# EAGLE board LSM9DS0_Breakout_Board-panel3 (EAGLE 7.1.0), part 1 of 3
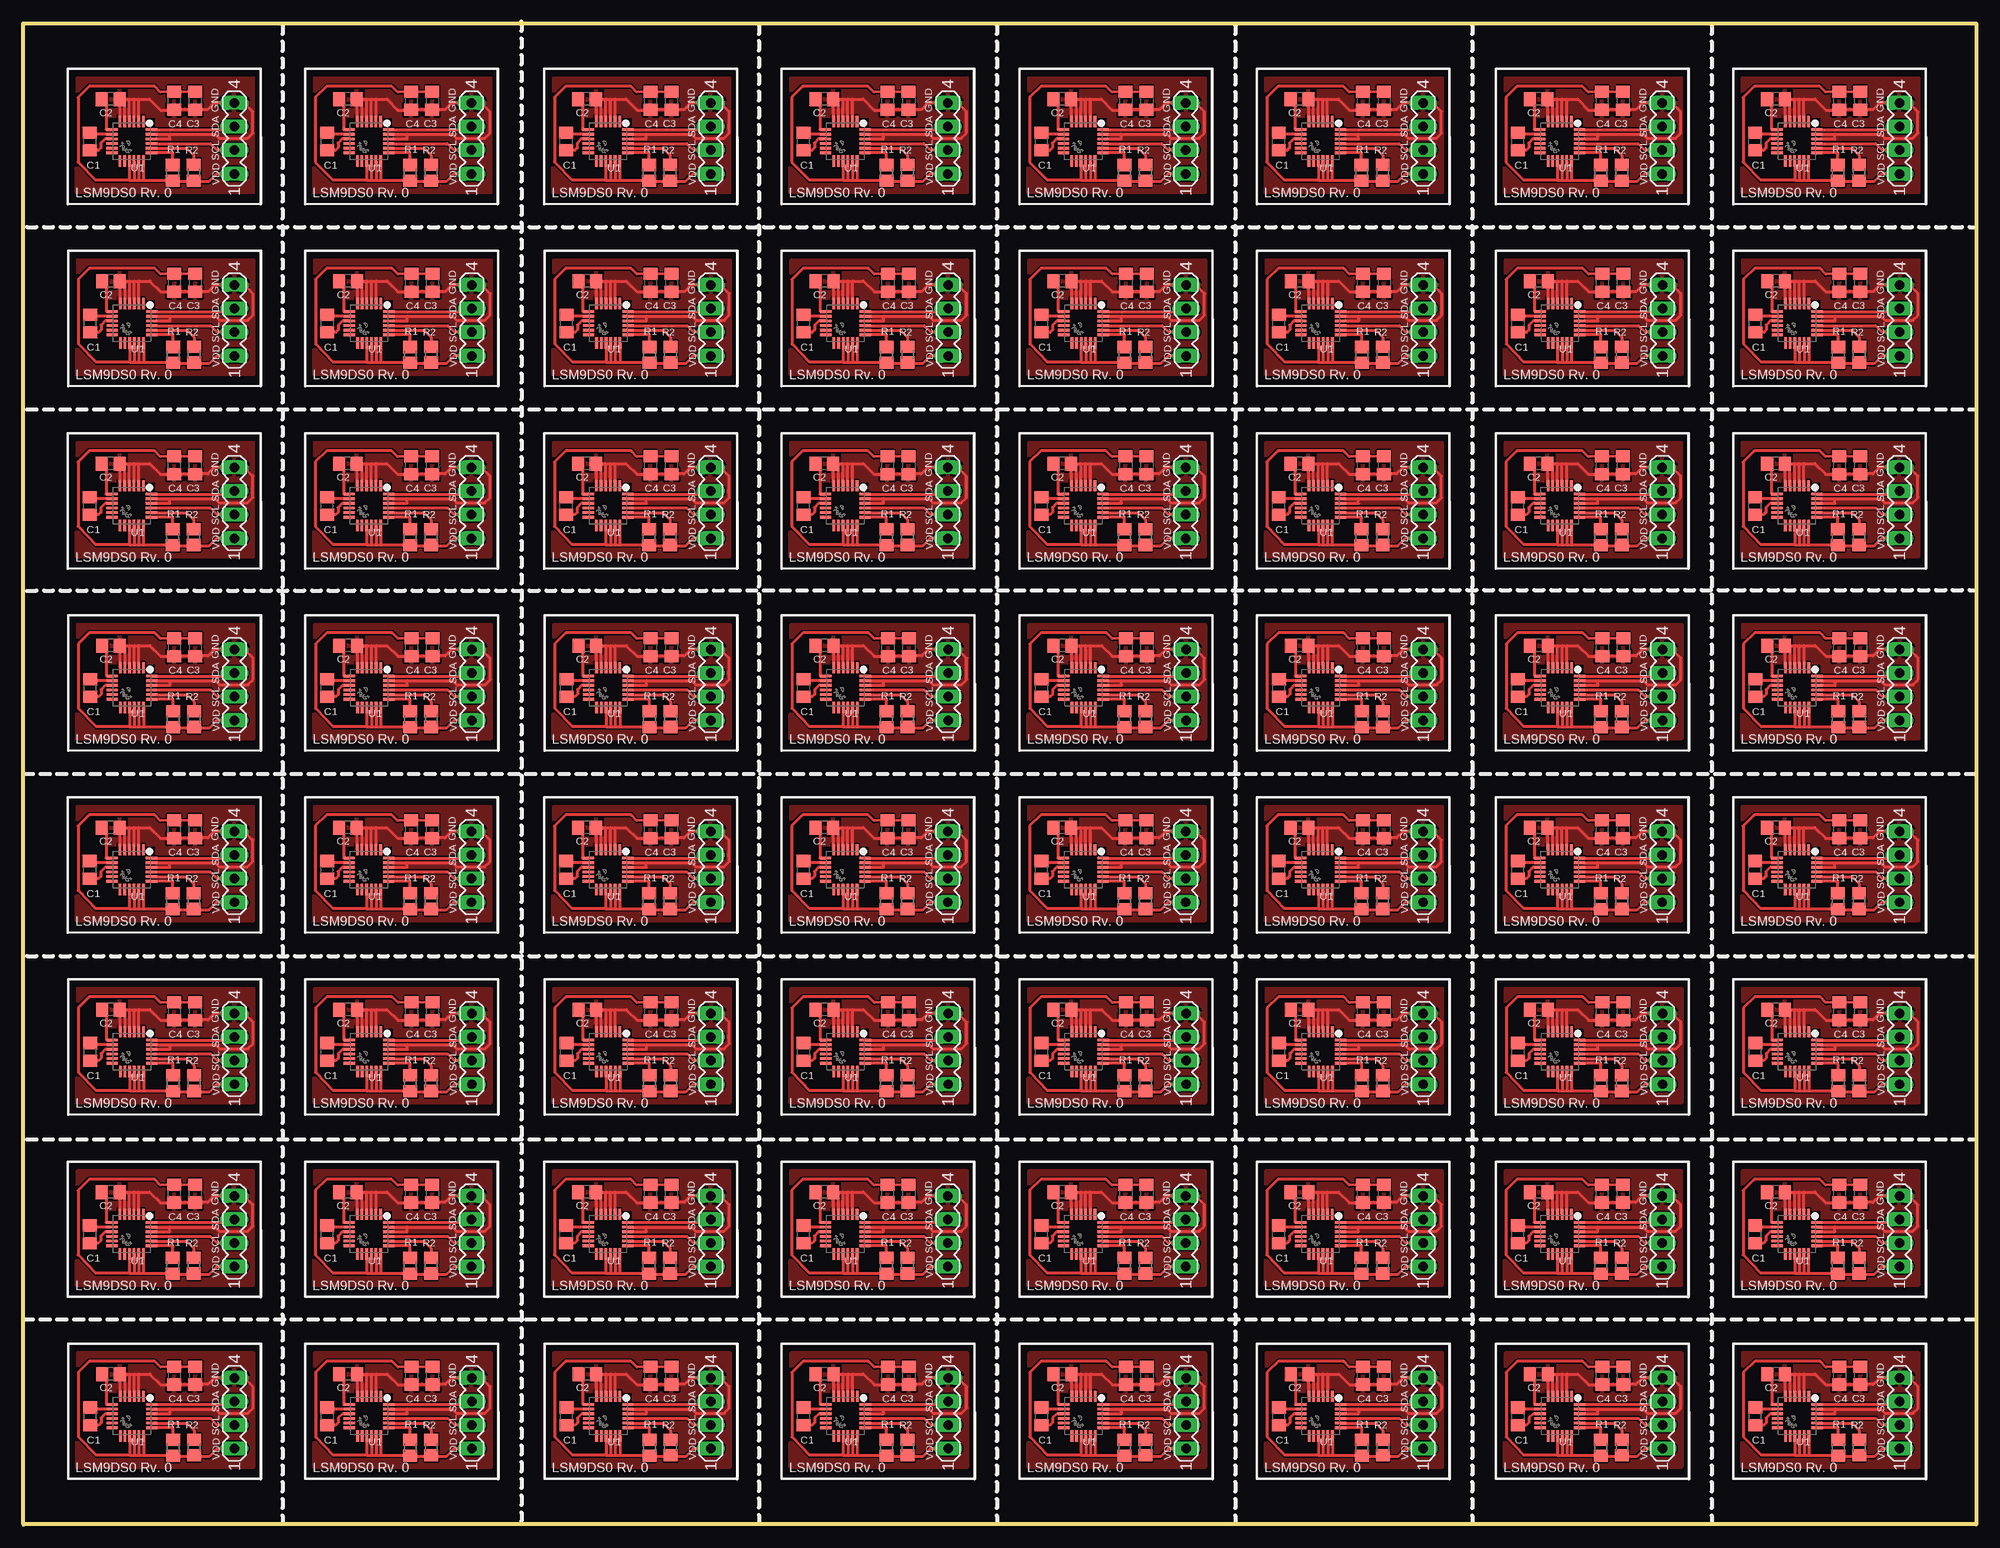
[diagram p0: board, top side]

Size 209.93 x 161.32 mm. Coordinates in mm from the lower left corner, seen from the top.
Outline: 0,161.32 209.91,161.32 209.93,0 0,0 0,161.32
Copper layers (1*16): Top 0.035559375mm / dielectric 1.501140625mm / Bottom 0.035559375mm
Design rules "4pcb-33board *": minimum track width 8mil, minimum drill 15mil, track to track 6mil, track to pad 6mil, pad to pad 6mil, via to via 6mil, smd to smd 6mil, copper to edge 10mil, drill to drill 10mil, minimum pad ring 10mil, minimum via ring 8mil, stop-mask expansion 4mil, vias tented up to drill 0mil, thermal gap 10mil
Net classes: 1 RFSIG: width 0.457 mm, clearance 0.205 mm to class 0, clearance 0.205 mm
bRestrict: area 10.2,10.1 to 13.2,13.1; area 10.2,29.6 to 13.1,32.7; area 10.2,49.2 to 13.2,52.3; area 10.2,68.8 to 13.1,71.9; area 10.2,88.3 to 13.2,91.4; area 10.2,107.9 to 13.1,111; area 10.2,127.5 to 13.2,130.6; area 10.2,147.1 to 13.1,150.1; area 35.7,10.1 to 38.7,13.1; area 35.7,29.6 to 38.6,32.7; area 35.7,49.2 to 38.7,52.3; area 35.7,68.8 to 38.6,71.9; 52 more areas

## Footprints (pad centres in the part's own frame; a part is rotated, then mirrored left to right if it is on the bottom)
C0805 = smd 1.3 x 1.5: 1 -0.95,0; 2 0.95,0
R0805 = smd 1.3 x 1.5: 1 -0.85,0; 2 0.85,0
MA04-1 = drill 1.016 long: 1 -3.81,0; 2 -1.27,0; 3 1.27,0; 4 3.81,0
LGA-24 = smd 1.208 x 0.29: 1 -2.129,1.25; 2 -2.129,0.75; 3 -2.129,0.25; 4 -2.129,-0.25; 5 -2.129,-0.75; 6 -2.129,-1.25; 13 2.129,-1.25; 14 2.129,-0.75; 15 2.129,-0.25; 16 2.129,0.25; 17 2.129,0.75; 18 2.129,1.25 | smd 0.29 x 1.208: 7 -1.25,-2.129; 8 -0.75,-2.129; 9 -0.25,-2.129; 10 0.25,-2.129; 11 0.75,-2.129; 12 1.25,-2.129; 19 1.25,2.129; 20 0.75,2.129; 21 0.25,2.129; 22 -0.25,2.129; 23 -0.75,2.129; 24 -1.25,2.129

## Placement (x,y rotation side)
C1  0.22uF  [C0805]  7.19,11.61 90 top
C2  4.7uF  [C0805]  9.42,16.15 180 top
C3  10uF  [C0805]  18.49,15.98 270 top
C4  100nF  [C0805]  16.23,15.98 270 top
C5  100nF  [C0805]  16.21,35.53 270 top
C6  10uF  [C0805]  18.47,35.53 270 top
C7  0.22uF  [C0805]  7.16,31.17 90 top
C8  4.7uF  [C0805]  9.4,35.71 180 top
C9  100nF  [C0805]  16.23,55.14 270 top
C10  10uF  [C0805]  18.49,55.14 270 top
C11  0.22uF  [C0805]  7.19,50.77 90 top
C12  4.7uF  [C0805]  9.42,55.32 180 top
C13  100nF  [C0805]  16.21,74.7 270 top
C14  10uF  [C0805]  18.47,74.7 270 top
C15  0.22uF  [C0805]  7.16,70.33 90 top
C16  4.7uF  [C0805]  9.4,74.88 180 top
C17  100nF  [C0805]  16.23,94.26 270 top
C18  10uF  [C0805]  18.49,94.26 270 top
C19  0.22uF  [C0805]  7.19,89.89 90 top
C20  4.7uF  [C0805]  9.42,94.44 180 top
C21  100nF  [C0805]  16.21,113.82 270 top
C22  10uF  [C0805]  18.47,113.82 270 top
C23  0.22uF  [C0805]  7.16,109.45 90 top
C24  4.7uF  [C0805]  9.4,114 180 top
C25  100nF  [C0805]  16.23,133.43 270 top
C26  10uF  [C0805]  18.49,133.43 270 top
C27  0.22uF  [C0805]  7.19,129.06 90 top
C28  4.7uF  [C0805]  9.42,133.6 180 top
C29  100nF  [C0805]  16.21,152.98 270 top
C30  10uF  [C0805]  18.47,152.98 270 top
C31  0.22uF  [C0805]  7.16,148.62 90 top
C32  4.7uF  [C0805]  9.4,153.16 180 top
C33  100nF  [C0805]  41.73,15.98 270 top
C34  10uF  [C0805]  43.99,15.98 270 top
C35  0.22uF  [C0805]  32.69,11.61 90 top
C36  4.7uF  [C0805]  34.92,16.15 180 top
C37  100nF  [C0805]  41.71,35.53 270 top
C38  10uF  [C0805]  43.97,35.53 270 top
C39  0.22uF  [C0805]  32.66,31.17 90 top
C40  4.7uF  [C0805]  34.9,35.71 180 top
C41  100nF  [C0805]  41.73,55.14 270 top
C42  10uF  [C0805]  43.99,55.14 270 top
C43  0.22uF  [C0805]  32.69,50.77 90 top
C44  4.7uF  [C0805]  34.92,55.32 180 top
C45  100nF  [C0805]  41.71,74.7 270 top
C46  10uF  [C0805]  43.97,74.7 270 top
C47  0.22uF  [C0805]  32.66,70.33 90 top
C48  4.7uF  [C0805]  34.9,74.88 180 top
C49  100nF  [C0805]  41.73,94.26 270 top
C50  10uF  [C0805]  43.99,94.26 270 top
C51  0.22uF  [C0805]  32.69,89.89 90 top
C52  4.7uF  [C0805]  34.92,94.44 180 top
C53  100nF  [C0805]  41.71,113.82 270 top
C54  10uF  [C0805]  43.97,113.82 270 top
C55  0.22uF  [C0805]  32.66,109.45 90 top
C56  4.7uF  [C0805]  34.9,114 180 top
C57  100nF  [C0805]  41.73,133.43 270 top
C58  10uF  [C0805]  43.99,133.43 270 top
C59  0.22uF  [C0805]  32.69,129.06 90 top
C60  4.7uF  [C0805]  34.92,133.6 180 top
C61  100nF  [C0805]  41.71,152.98 270 top
C62  10uF  [C0805]  43.97,152.98 270 top
C63  0.22uF  [C0805]  32.66,148.62 90 top
C64  4.7uF  [C0805]  34.9,153.16 180 top
C65  100nF  [C0805]  67.44,15.98 270 top
C66  10uF  [C0805]  69.7,15.98 270 top
C67  0.22uF  [C0805]  58.39,11.61 90 top
C68  4.7uF  [C0805]  60.63,16.15 180 top
C69  100nF  [C0805]  67.41,35.53 270 top
C70  10uF  [C0805]  69.67,35.53 270 top
C71  0.22uF  [C0805]  58.37,31.17 90 top
C72  4.7uF  [C0805]  60.6,35.71 180 top
C73  100nF  [C0805]  67.44,55.14 270 top
C74  10uF  [C0805]  69.7,55.14 270 top
C75  0.22uF  [C0805]  58.39,50.77 90 top
C76  4.7uF  [C0805]  60.63,55.32 180 top
C77  100nF  [C0805]  67.41,74.7 270 top
C78  10uF  [C0805]  69.67,74.7 270 top
C79  0.22uF  [C0805]  58.37,70.33 90 top
C80  4.7uF  [C0805]  60.6,74.88 180 top
C81  100nF  [C0805]  67.44,94.26 270 top
C82  10uF  [C0805]  69.7,94.26 270 top
C83  0.22uF  [C0805]  58.39,89.89 90 top
C84  4.7uF  [C0805]  60.63,94.44 180 top
C85  100nF  [C0805]  67.41,113.82 270 top
C86  10uF  [C0805]  69.67,113.82 270 top
C87  0.22uF  [C0805]  58.37,109.45 90 top
C88  4.7uF  [C0805]  60.6,114 180 top
C89  100nF  [C0805]  67.44,133.43 270 top
C90  10uF  [C0805]  69.7,133.43 270 top
C91  0.22uF  [C0805]  58.39,129.06 90 top
C92  4.7uF  [C0805]  60.63,133.6 180 top
C93  100nF  [C0805]  67.41,152.98 270 top
C94  10uF  [C0805]  69.67,152.98 270 top
C95  0.22uF  [C0805]  58.37,148.62 90 top
C96  4.7uF  [C0805]  60.6,153.16 180 top
C97  100nF  [C0805]  92.94,15.98 270 top
C98  10uF  [C0805]  95.2,15.98 270 top
C99  0.22uF  [C0805]  83.9,11.61 90 top
C100  4.7uF  [C0805]  86.13,16.15 180 top
C101  100nF  [C0805]  92.91,35.53 270 top
C102  10uF  [C0805]  95.17,35.53 270 top
C103  0.22uF  [C0805]  83.87,31.17 90 top
C104  4.7uF  [C0805]  86.11,35.71 180 top
C105  100nF  [C0805]  92.94,55.14 270 top
C106  10uF  [C0805]  95.2,55.14 270 top
C107  0.22uF  [C0805]  83.9,50.77 90 top
C108  4.7uF  [C0805]  86.13,55.32 180 top
C109  100nF  [C0805]  92.91,74.7 270 top
C110  10uF  [C0805]  95.17,74.7 270 top
C111  0.22uF  [C0805]  83.87,70.33 90 top
C112  4.7uF  [C0805]  86.11,74.88 180 top
C113  100nF  [C0805]  92.94,94.26 270 top
C114  10uF  [C0805]  95.2,94.26 270 top
C115  0.22uF  [C0805]  83.9,89.89 90 top
C116  4.7uF  [C0805]  86.13,94.44 180 top
C117  100nF  [C0805]  92.91,113.82 270 top
C118  10uF  [C0805]  95.17,113.82 270 top
C119  0.22uF  [C0805]  83.87,109.45 90 top
C120  4.7uF  [C0805]  86.11,114 180 top
C121  100nF  [C0805]  92.94,133.43 270 top
C122  10uF  [C0805]  95.2,133.43 270 top
C123  0.22uF  [C0805]  83.9,129.06 90 top
C124  4.7uF  [C0805]  86.13,133.6 180 top
C125  100nF  [C0805]  92.91,152.98 270 top
C126  10uF  [C0805]  95.17,152.98 270 top
C127  0.22uF  [C0805]  83.87,148.62 90 top
C128  4.7uF  [C0805]  86.11,153.16 180 top
C129  100nF  [C0805]  118.52,15.98 270 top
C130  10uF  [C0805]  120.78,15.98 270 top
C131  0.22uF  [C0805]  109.47,11.61 90 top
C132  4.7uF  [C0805]  111.71,16.15 180 top
C133  100nF  [C0805]  118.49,35.53 270 top
C134  10uF  [C0805]  120.75,35.53 270 top
C135  0.22uF  [C0805]  109.45,31.17 90 top
C136  4.7uF  [C0805]  111.68,35.71 180 top
C137  100nF  [C0805]  118.52,55.14 270 top
C138  10uF  [C0805]  120.78,55.14 270 top
C139  0.22uF  [C0805]  109.47,50.77 90 top
C140  4.7uF  [C0805]  111.71,55.32 180 top
C141  100nF  [C0805]  118.49,74.7 270 top
C142  10uF  [C0805]  120.75,74.7 270 top
C143  0.22uF  [C0805]  109.45,70.33 90 top
C144  4.7uF  [C0805]  111.68,74.88 180 top
C145  100nF  [C0805]  118.52,94.26 270 top
C146  10uF  [C0805]  120.78,94.26 270 top
C147  0.22uF  [C0805]  109.47,89.89 90 top
C148  4.7uF  [C0805]  111.71,94.44 180 top
C149  100nF  [C0805]  118.49,113.82 270 top
C150  10uF  [C0805]  120.75,113.82 270 top
C151  0.22uF  [C0805]  109.45,109.45 90 top
C152  4.7uF  [C0805]  111.68,114 180 top
C153  100nF  [C0805]  118.52,133.43 270 top
C154  10uF  [C0805]  120.78,133.43 270 top
C155  0.22uF  [C0805]  109.47,129.06 90 top
C156  4.7uF  [C0805]  111.71,133.6 180 top
C157  100nF  [C0805]  118.49,152.98 270 top
C158  10uF  [C0805]  120.75,152.98 270 top
C159  0.22uF  [C0805]  109.45,148.62 90 top
C160  4.7uF  [C0805]  111.68,153.16 180 top
C161  100nF  [C0805]  144.02,15.98 270 top
C162  10uF  [C0805]  146.28,15.98 270 top
C163  0.22uF  [C0805]  134.98,11.61 90 top
C164  4.7uF  [C0805]  137.21,16.15 180 top
C165  100nF  [C0805]  143.99,35.53 270 top
C166  10uF  [C0805]  146.25,35.53 270 top
C167  0.22uF  [C0805]  134.95,31.17 90 top
C168  4.7uF  [C0805]  137.19,35.71 180 top
C169  100nF  [C0805]  144.02,55.14 270 top
C170  10uF  [C0805]  146.28,55.14 270 top
C171  0.22uF  [C0805]  134.98,50.77 90 top
C172  4.7uF  [C0805]  137.21,55.32 180 top
C173  100nF  [C0805]  143.99,74.7 270 top
C174  10uF  [C0805]  146.25,74.7 270 top
C175  0.22uF  [C0805]  134.95,70.33 90 top
C176  4.7uF  [C0805]  137.19,74.88 180 top
C177  100nF  [C0805]  144.02,94.26 270 top
C178  10uF  [C0805]  146.28,94.26 270 top
C179  0.22uF  [C0805]  134.98,89.89 90 top
C180  4.7uF  [C0805]  137.21,94.44 180 top
C181  100nF  [C0805]  143.99,113.82 270 top
C182  10uF  [C0805]  146.25,113.82 270 top
C183  0.22uF  [C0805]  134.95,109.45 90 top
C184  4.7uF  [C0805]  137.19,114 180 top
C185  100nF  [C0805]  144.02,133.43 270 top
C186  10uF  [C0805]  146.28,133.43 270 top
C187  0.22uF  [C0805]  134.98,129.06 90 top
C188  4.7uF  [C0805]  137.21,133.6 180 top
C189  100nF  [C0805]  143.99,152.98 270 top
C190  10uF  [C0805]  146.25,152.98 270 top
C191  0.22uF  [C0805]  134.95,148.62 90 top
C192  4.7uF  [C0805]  137.19,153.16 180 top
C193  100nF  [C0805]  169.72,15.98 270 top
C194  10uF  [C0805]  171.98,15.98 270 top
C195  0.22uF  [C0805]  160.68,11.61 90 top
C196  4.7uF  [C0805]  162.92,16.15 180 top
C197  100nF  [C0805]  169.7,35.53 270 top
C198  10uF  [C0805]  171.96,35.53 270 top
C199  0.22uF  [C0805]  160.66,31.17 90 top
C200  4.7uF  [C0805]  162.89,35.71 180 top
C201  100nF  [C0805]  169.72,55.14 270 top
C202  10uF  [C0805]  171.98,55.14 270 top
C203  0.22uF  [C0805]  160.68,50.77 90 top
C204  4.7uF  [C0805]  162.92,55.32 180 top
C205  100nF  [C0805]  169.7,74.7 270 top
C206  10uF  [C0805]  171.96,74.7 270 top
C207  0.22uF  [C0805]  160.66,70.33 90 top
C208  4.7uF  [C0805]  162.89,74.88 180 top
C209  100nF  [C0805]  169.72,94.26 270 top
C210  10uF  [C0805]  171.98,94.26 270 top
C211  0.22uF  [C0805]  160.68,89.89 90 top
C212  4.7uF  [C0805]  162.92,94.44 180 top
C213  100nF  [C0805]  169.7,113.82 270 top
C214  10uF  [C0805]  171.96,113.82 270 top
C215  0.22uF  [C0805]  160.66,109.45 90 top
C216  4.7uF  [C0805]  162.89,114 180 top
C217  100nF  [C0805]  169.72,133.43 270 top
C218  10uF  [C0805]  171.98,133.43 270 top
C219  0.22uF  [C0805]  160.68,129.06 90 top
C220  4.7uF  [C0805]  162.92,133.6 180 top
C221  100nF  [C0805]  169.7,152.98 270 top
C222  10uF  [C0805]  171.96,152.98 270 top
C223  0.22uF  [C0805]  160.66,148.62 90 top
C224  4.7uF  [C0805]  162.89,153.16 180 top
C225  100nF  [C0805]  195.22,15.98 270 top
C226  10uF  [C0805]  197.49,15.98 270 top
C227  0.22uF  [C0805]  186.18,11.61 90 top
C228  4.7uF  [C0805]  188.42,16.15 180 top
C229  100nF  [C0805]  195.2,35.53 270 top
C230  10uF  [C0805]  197.46,35.53 270 top
C231  0.22uF  [C0805]  186.16,31.17 90 top
C232  4.7uF  [C0805]  188.39,35.71 180 top
C233  100nF  [C0805]  195.22,55.14 270 top
C234  10uF  [C0805]  197.49,55.14 270 top
C235  0.22uF  [C0805]  186.18,50.77 90 top
C236  4.7uF  [C0805]  188.42,55.32 180 top
C237  100nF  [C0805]  195.2,74.7 270 top
C238  10uF  [C0805]  197.46,74.7 270 top
C239  0.22uF  [C0805]  186.16,70.33 90 top
C240  4.7uF  [C0805]  188.39,74.88 180 top
C241  100nF  [C0805]  195.22,94.26 270 top
C242  10uF  [C0805]  197.49,94.26 270 top
C243  0.22uF  [C0805]  186.18,89.89 90 top
C244  4.7uF  [C0805]  188.42,94.44 180 top
C245  100nF  [C0805]  195.2,113.82 270 top
C246  10uF  [C0805]  197.46,113.82 270 top
C247  0.22uF  [C0805]  186.16,109.45 90 top
C248  4.7uF  [C0805]  188.39,114 180 top
C249  100nF  [C0805]  195.22,133.43 270 top
C250  10uF  [C0805]  197.49,133.43 270 top
C251  0.22uF  [C0805]  186.18,129.06 90 top
C252  4.7uF  [C0805]  188.42,133.6 180 top
C253  100nF  [C0805]  195.2,152.98 270 top
C254  10uF  [C0805]  197.46,152.98 270 top
C255  0.22uF  [C0805]  186.16,148.62 90 top
C256  4.7uF  [C0805]  188.39,153.16 180 top
R1  10k  [R0805]  16.1,8.23 270 top
R2  10k  [R0805]  18.36,8.25 270 top
R3  10k  [R0805]  16.08,27.79 270 top
R4  10k  [R0805]  18.34,27.81 270 top
R5  10k  [R0805]  16.1,47.4 270 top
R6  10k  [R0805]  18.36,47.42 270 top
R7  10k  [R0805]  16.08,66.95 270 top
R8  10k  [R0805]  18.34,66.98 270 top
R9  10k  [R0805]  16.1,86.51 270 top
R10  10k  [R0805]  18.36,86.54 270 top
R11  10k  [R0805]  16.08,106.07 270 top
R12  10k  [R0805]  18.34,106.1 270 top
R13  10k  [R0805]  16.1,125.68 270 top
R14  10k  [R0805]  18.36,125.7 270 top
R15  10k  [R0805]  16.08,145.24 270 top
R16  10k  [R0805]  18.34,145.26 270 top
R17  10k  [R0805]  41.61,8.23 270 top
R18  10k  [R0805]  43.87,8.25 270 top
R19  10k  [R0805]  41.58,27.79 270 top
R20  10k  [R0805]  43.84,27.81 270 top
R21  10k  [R0805]  41.61,47.4 270 top
R22  10k  [R0805]  43.87,47.42 270 top
R23  10k  [R0805]  41.58,66.95 270 top
R24  10k  [R0805]  43.84,66.98 270 top
R25  10k  [R0805]  41.61,86.51 270 top
R26  10k  [R0805]  43.87,86.54 270 top
R27  10k  [R0805]  41.58,106.07 270 top
R28  10k  [R0805]  43.84,106.1 270 top
R29  10k  [R0805]  41.61,125.68 270 top
R30  10k  [R0805]  43.87,125.7 270 top
R31  10k  [R0805]  41.58,145.24 270 top
R32  10k  [R0805]  43.84,145.26 270 top
R33  10k  [R0805]  67.31,8.23 270 top
R34  10k  [R0805]  69.57,8.25 270 top
R35  10k  [R0805]  67.28,27.79 270 top
R36  10k  [R0805]  69.55,27.81 270 top
R37  10k  [R0805]  67.31,47.4 270 top
R38  10k  [R0805]  69.57,47.42 270 top
R39  10k  [R0805]  67.28,66.95 270 top
R40  10k  [R0805]  69.55,66.98 270 top
R41  10k  [R0805]  67.31,86.51 270 top
R42  10k  [R0805]  69.57,86.54 270 top
R43  10k  [R0805]  67.28,106.07 270 top
R44  10k  [R0805]  69.55,106.1 270 top
R45  10k  [R0805]  67.31,125.68 270 top
R46  10k  [R0805]  69.57,125.7 270 top
R47  10k  [R0805]  67.28,145.24 270 top
R48  10k  [R0805]  69.55,145.26 270 top
R49  10k  [R0805]  92.81,8.23 270 top
R50  10k  [R0805]  95.07,8.25 270 top
R51  10k  [R0805]  92.79,27.79 270 top
R52  10k  [R0805]  95.05,27.81 270 top
R53  10k  [R0805]  92.81,47.4 270 top
R54  10k  [R0805]  95.07,47.42 270 top
R55  10k  [R0805]  92.79,66.95 270 top
R56  10k  [R0805]  95.05,66.98 270 top
R57  10k  [R0805]  92.81,86.51 270 top
R58  10k  [R0805]  95.07,86.54 270 top
R59  10k  [R0805]  92.79,106.07 270 top
R60  10k  [R0805]  95.05,106.1 270 top
R61  10k  [R0805]  92.81,125.68 270 top
R62  10k  [R0805]  95.07,125.7 270 top
R63  10k  [R0805]  92.79,145.24 270 top
R64  10k  [R0805]  95.05,145.26 270 top
R65  10k  [R0805]  118.39,8.23 270 top
R66  10k  [R0805]  120.65,8.25 270 top
R67  10k  [R0805]  118.36,27.79 270 top
R68  10k  [R0805]  120.62,27.81 270 top
R69  10k  [R0805]  118.39,47.4 270 top
R70  10k  [R0805]  120.65,47.42 270 top
R71  10k  [R0805]  118.36,66.95 270 top
R72  10k  [R0805]  120.62,66.98 270 top
R73  10k  [R0805]  118.39,86.51 270 top
R74  10k  [R0805]  120.65,86.54 270 top
R75  10k  [R0805]  118.36,106.07 270 top
R76  10k  [R0805]  120.62,106.1 270 top
R77  10k  [R0805]  118.39,125.68 270 top
R78  10k  [R0805]  120.65,125.7 270 top
R79  10k  [R0805]  118.36,145.24 270 top
R80  10k  [R0805]  120.62,145.26 270 top
R81  10k  [R0805]  143.89,8.23 270 top
R82  10k  [R0805]  146.15,8.25 270 top
R83  10k  [R0805]  143.87,27.79 270 top
R84  10k  [R0805]  146.13,27.81 270 top
R85  10k  [R0805]  143.89,47.4 270 top
R86  10k  [R0805]  146.15,47.42 270 top
R87  10k  [R0805]  143.87,66.95 270 top
R88  10k  [R0805]  146.13,66.98 270 top
R89  10k  [R0805]  143.89,86.51 270 top
R90  10k  [R0805]  146.15,86.54 270 top
R91  10k  [R0805]  143.87,106.07 270 top
R92  10k  [R0805]  146.13,106.1 270 top
R93  10k  [R0805]  143.89,125.68 270 top
R94  10k  [R0805]  146.15,125.7 270 top
R95  10k  [R0805]  143.87,145.24 270 top
R96  10k  [R0805]  146.13,145.26 270 top
R97  10k  [R0805]  169.6,8.23 270 top
R98  10k  [R0805]  171.86,8.25 270 top
R99  10k  [R0805]  169.57,27.79 270 top
R100  10k  [R0805]  171.83,27.81 270 top
R101  10k  [R0805]  169.6,47.4 270 top
R102  10k  [R0805]  171.86,47.42 270 top
R103  10k  [R0805]  169.57,66.95 270 top
R104  10k  [R0805]  171.83,66.98 270 top
R105  10k  [R0805]  169.6,86.51 270 top
R106  10k  [R0805]  171.86,86.54 270 top
R107  10k  [R0805]  169.57,106.07 270 top
R108  10k  [R0805]  171.83,106.1 270 top
R109  10k  [R0805]  169.6,125.68 270 top
R110  10k  [R0805]  171.86,125.7 270 top
R111  10k  [R0805]  169.57,145.24 270 top
R112  10k  [R0805]  171.83,145.26 270 top
R113  10k  [R0805]  195.1,8.23 270 top
R114  10k  [R0805]  197.36,8.25 270 top
R115  10k  [R0805]  195.07,27.79 270 top
R116  10k  [R0805]  197.33,27.81 270 top
R117  10k  [R0805]  195.1,47.4 270 top
R118  10k  [R0805]  197.36,47.42 270 top
R119  10k  [R0805]  195.07,66.95 270 top
R120  10k  [R0805]  197.33,66.98 270 top
R121  10k  [R0805]  195.1,86.51 270 top
R122  10k  [R0805]  197.36,86.54 270 top
R123  10k  [R0805]  195.07,106.07 270 top
R124  10k  [R0805]  197.33,106.1 270 top
R125  10k  [R0805]  195.1,125.68 270 top
R126  10k  [R0805]  197.36,125.7 270 top
R127  10k  [R0805]  195.07,145.24 270 top
R128  10k  [R0805]  197.33,145.26 270 top
SV1  JP1  [MA04-1]  22.71,11.94 90 top
SV2  JP1  [MA04-1]  22.68,31.5 90 top
SV3  JP1  [MA04-1]  22.71,51.1 90 top
SV4  JP1  [MA04-1]  22.68,70.66 90 top
SV5  JP1  [MA04-1]  22.71,90.22 90 top
SV6  JP1  [MA04-1]  22.68,109.78 90 top
SV7  JP1  [MA04-1]  22.71,129.39 90 top
SV8  JP1  [MA04-1]  22.68,148.95 90 top
SV9  JP1  [MA04-1]  48.21,11.94 90 top
SV10  JP1  [MA04-1]  48.18,31.5 90 top
SV11  JP1  [MA04-1]  48.21,51.1 90 top
SV12  JP1  [MA04-1]  48.18,70.66 90 top
SV13  JP1  [MA04-1]  48.21,90.22 90 top
SV14  JP1  [MA04-1]  48.18,109.78 90 top
SV15  JP1  [MA04-1]  48.21,129.39 90 top
SV16  JP1  [MA04-1]  48.18,148.95 90 top
SV17  JP1  [MA04-1]  73.91,11.94 90 top
SV18  JP1  [MA04-1]  73.89,31.5 90 top
SV19  JP1  [MA04-1]  73.91,51.1 90 top
SV20  JP1  [MA04-1]  73.89,70.66 90 top
SV21  JP1  [MA04-1]  73.91,90.22 90 top
SV22  JP1  [MA04-1]  73.89,109.78 90 top
SV23  JP1  [MA04-1]  73.91,129.39 90 top
SV24  JP1  [MA04-1]  73.89,148.95 90 top
SV25  JP1  [MA04-1]  99.42,11.94 90 top
SV26  JP1  [MA04-1]  99.39,31.5 90 top
SV27  JP1  [MA04-1]  99.42,51.1 90 top
SV28  JP1  [MA04-1]  99.39,70.66 90 top
SV29  JP1  [MA04-1]  99.42,90.22 90 top
SV30  JP1  [MA04-1]  99.39,109.78 90 top
SV31  JP1  [MA04-1]  99.42,129.39 90 top
SV32  JP1  [MA04-1]  99.39,148.95 90 top
SV33  JP1  [MA04-1]  124.99,11.94 90 top
SV34  JP1  [MA04-1]  124.97,31.5 90 top
SV35  JP1  [MA04-1]  124.99,51.1 90 top
SV36  JP1  [MA04-1]  124.97,70.66 90 top
SV37  JP1  [MA04-1]  124.99,90.22 90 top
SV38  JP1  [MA04-1]  124.97,109.78 90 top
SV39  JP1  [MA04-1]  124.99,129.39 90 top
SV40  JP1  [MA04-1]  124.97,148.95 90 top
SV41  JP1  [MA04-1]  150.5,11.94 90 top
SV42  JP1  [MA04-1]  150.47,31.5 90 top
SV43  JP1  [MA04-1]  150.5,51.1 90 top
SV44  JP1  [MA04-1]  150.47,70.66 90 top
SV45  JP1  [MA04-1]  150.5,90.22 90 top
SV46  JP1  [MA04-1]  150.47,109.78 90 top
SV47  JP1  [MA04-1]  150.5,129.39 90 top
SV48  JP1  [MA04-1]  150.47,148.95 90 top
SV49  JP1  [MA04-1]  176.2,11.94 90 top
SV50  JP1  [MA04-1]  176.17,31.5 90 top
SV51  JP1  [MA04-1]  176.2,51.1 90 top
SV52  JP1  [MA04-1]  176.17,70.66 90 top
SV53  JP1  [MA04-1]  176.2,90.22 90 top
SV54  JP1  [MA04-1]  176.17,109.78 90 top
SV55  JP1  [MA04-1]  176.2,129.39 90 top
SV56  JP1  [MA04-1]  176.17,148.95 90 top
SV57  JP1  [MA04-1]  201.7,11.94 90 top
SV58  JP1  [MA04-1]  201.68,31.5 90 top
SV59  JP1  [MA04-1]  201.7,51.1 90 top
SV60  JP1  [MA04-1]  201.68,70.66 90 top
SV61  JP1  [MA04-1]  201.7,90.22 90 top
SV62  JP1  [MA04-1]  201.68,109.78 90 top
SV63  JP1  [MA04-1]  201.7,129.39 90 top
SV64  JP1  [MA04-1]  201.68,148.95 90 top
U1  LSM9DS0  [LGA-24]  11.68,11.63 270 top
U2  LSM9DS0  [LGA-24]  11.66,31.19 270 top
U3  LSM9DS0  [LGA-24]  11.68,50.8 270 top
U4  LSM9DS0  [LGA-24]  11.66,70.36 270 top
U5  LSM9DS0  [LGA-24]  11.68,89.92 270 top
U6  LSM9DS0  [LGA-24]  11.66,109.47 270 top
U7  LSM9DS0  [LGA-24]  11.68,129.08 270 top
U8  LSM9DS0  [LGA-24]  11.66,148.64 270 top
U9  LSM9DS0  [LGA-24]  37.19,11.63 270 top
U10  LSM9DS0  [LGA-24]  37.16,31.19 270 top
U11  LSM9DS0  [LGA-24]  37.19,50.8 270 top
U12  LSM9DS0  [LGA-24]  37.16,70.36 270 top
U13  LSM9DS0  [LGA-24]  37.19,89.92 270 top
U14  LSM9DS0  [LGA-24]  37.16,109.47 270 top
U15  LSM9DS0  [LGA-24]  37.19,129.08 270 top
U16  LSM9DS0  [LGA-24]  37.16,148.64 270 top
U17  LSM9DS0  [LGA-24]  62.89,11.63 270 top
U18  LSM9DS0  [LGA-24]  62.87,31.19 270 top
U19  LSM9DS0  [LGA-24]  62.89,50.8 270 top
U20  LSM9DS0  [LGA-24]  62.87,70.36 270 top
U21  LSM9DS0  [LGA-24]  62.89,89.92 270 top
U22  LSM9DS0  [LGA-24]  62.87,109.47 270 top
U23  LSM9DS0  [LGA-24]  62.89,129.08 270 top
U24  LSM9DS0  [LGA-24]  62.87,148.64 270 top
U25  LSM9DS0  [LGA-24]  88.39,11.63 270 top
U26  LSM9DS0  [LGA-24]  88.37,31.19 270 top
U27  LSM9DS0  [LGA-24]  88.39,50.8 270 top
U28  LSM9DS0  [LGA-24]  88.37,70.36 270 top
U29  LSM9DS0  [LGA-24]  88.39,89.92 270 top
U30  LSM9DS0  [LGA-24]  88.37,109.47 270 top
U31  LSM9DS0  [LGA-24]  88.39,129.08 270 top
U32  LSM9DS0  [LGA-24]  88.37,148.64 270 top
U33  LSM9DS0  [LGA-24]  113.97,11.63 270 top
U34  LSM9DS0  [LGA-24]  113.94,31.19 270 top
U35  LSM9DS0  [LGA-24]  113.97,50.8 270 top
U36  LSM9DS0  [LGA-24]  113.94,70.36 270 top
U37  LSM9DS0  [LGA-24]  113.97,89.92 270 top
U38  LSM9DS0  [LGA-24]  113.94,109.47 270 top
U39  LSM9DS0  [LGA-24]  113.97,129.08 270 top
U40  LSM9DS0  [LGA-24]  113.94,148.64 270 top
U41  LSM9DS0  [LGA-24]  139.47,11.63 270 top
U42  LSM9DS0  [LGA-24]  139.45,31.19 270 top
U43  LSM9DS0  [LGA-24]  139.47,50.8 270 top
U44  LSM9DS0  [LGA-24]  139.45,70.36 270 top
U45  LSM9DS0  [LGA-24]  139.47,89.92 270 top
U46  LSM9DS0  [LGA-24]  139.45,109.47 270 top
U47  LSM9DS0  [LGA-24]  139.47,129.08 270 top
U48  LSM9DS0  [LGA-24]  139.45,148.64 270 top
U49  LSM9DS0  [LGA-24]  165.18,11.63 270 top
U50  LSM9DS0  [LGA-24]  165.15,31.19 270 top
U51  LSM9DS0  [LGA-24]  165.18,50.8 270 top
U52  LSM9DS0  [LGA-24]  165.15,70.36 270 top
U53  LSM9DS0  [LGA-24]  165.18,89.92 270 top
U54  LSM9DS0  [LGA-24]  165.15,109.47 270 top
U55  LSM9DS0  [LGA-24]  165.18,129.08 270 top
U56  LSM9DS0  [LGA-24]  165.15,148.64 270 top
U57  LSM9DS0  [LGA-24]  190.68,11.63 270 top
U58  LSM9DS0  [LGA-24]  190.65,31.19 270 top
U59  LSM9DS0  [LGA-24]  190.68,50.8 270 top
U60  LSM9DS0  [LGA-24]  190.65,70.36 270 top
U61  LSM9DS0  [LGA-24]  190.68,89.92 270 top
U62  LSM9DS0  [LGA-24]  190.65,109.47 270 top
U63  LSM9DS0  [LGA-24]  190.68,129.08 270 top
U64  LSM9DS0  [LGA-24]  190.65,148.64 270 top

## Library data of the parts
C1-C256 = rcl
R1-R128 = resistor
SV1-SV64 = con-lstb; OC_FARNELL: unknown; OC_NEWARK: unknown
U1-U64 = Controller

## Nets
GND: C2.1 C3.2 C4.2 SV1.4 U1.2 U1.3 U1.4 U1.5 U1.6 U1.22 U1.23
GND1: C5.2 C6.2 C8.1 SV2.4 U2.2 U2.3 U2.4 U2.5 U2.6 U2.22 U2.23
GND2: C9.2 C10.2 C12.1 SV3.4 U3.2 U3.3 U3.4 U3.5 U3.6 U3.22 U3.23
GND3: C13.2 C14.2 C16.1 SV4.4 U4.2 U4.3 U4.4 U4.5 U4.6 U4.22 U4.23
GND4: C17.2 C18.2 C20.1 SV5.4 U5.2 U5.3 U5.4 U5.5 U5.6 U5.22 U5.23
GND5: C21.2 C22.2 C24.1 SV6.4 U6.2 U6.3 U6.4 U6.5 U6.6 U6.22 U6.23
GND6: C25.2 C26.2 C28.1 SV7.4 U7.2 U7.3 U7.4 U7.5 U7.6 U7.22 U7.23
GND7: C29.2 C30.2 C32.1 SV8.4 U8.2 U8.3 U8.4 U8.5 U8.6 U8.22 U8.23
GND8: C33.2 C34.2 C36.1 SV9.4 U9.2 U9.3 U9.4 U9.5 U9.6 U9.22 U9.23
GND9: C37.2 C38.2 C40.1 SV10.4 U10.2 U10.3 U10.4 U10.5 U10.6 U10.22 U10.23
GND10: C41.2 C42.2 C44.1 SV11.4 U11.2 U11.3 U11.4 U11.5 U11.6 U11.22 U11.23
GND11: C45.2 C46.2 C48.1 SV12.4 U12.2 U12.3 U12.4 U12.5 U12.6 U12.22 U12.23
GND12: C49.2 C50.2 C52.1 SV13.4 U13.2 U13.3 U13.4 U13.5 U13.6 U13.22 U13.23
GND13: C53.2 C54.2 C56.1 SV14.4 U14.2 U14.3 U14.4 U14.5 U14.6 U14.22 U14.23
GND14: C57.2 C58.2 C60.1 SV15.4 U15.2 U15.3 U15.4 U15.5 U15.6 U15.22 U15.23
GND15: C61.2 C62.2 C64.1 SV16.4 U16.2 U16.3 U16.4 U16.5 U16.6 U16.22 U16.23
GND16: C65.2 C66.2 C68.1 SV17.4 U17.2 U17.3 U17.4 U17.5 U17.6 U17.22 U17.23
GND17: C69.2 C70.2 C72.1 SV18.4 U18.2 U18.3 U18.4 U18.5 U18.6 U18.22 U18.23
GND18: C73.2 C74.2 C76.1 SV19.4 U19.2 U19.3 U19.4 U19.5 U19.6 U19.22 U19.23
GND19: C77.2 C78.2 C80.1 SV20.4 U20.2 U20.3 U20.4 U20.5 U20.6 U20.22 U20.23
GND20: C81.2 C82.2 C84.1 SV21.4 U21.2 U21.3 U21.4 U21.5 U21.6 U21.22 U21.23
GND21: C85.2 C86.2 C88.1 SV22.4 U22.2 U22.3 U22.4 U22.5 U22.6 U22.22 U22.23
GND22: C89.2 C90.2 C92.1 SV23.4 U23.2 U23.3 U23.4 U23.5 U23.6 U23.22 U23.23
GND23: C93.2 C94.2 C96.1 SV24.4 U24.2 U24.3 U24.4 U24.5 U24.6 U24.22 U24.23
GND24: C97.2 C98.2 C100.1 SV25.4 U25.2 U25.3 U25.4 U25.5 U25.6 U25.22 U25.23
GND25: C101.2 C102.2 C104.1 SV26.4 U26.2 U26.3 U26.4 U26.5 U26.6 U26.22 U26.23
GND26: C105.2 C106.2 C108.1 SV27.4 U27.2 U27.3 U27.4 U27.5 U27.6 U27.22 U27.23
GND27: C109.2 C110.2 C112.1 SV28.4 U28.2 U28.3 U28.4 U28.5 U28.6 U28.22 U28.23
GND28: C113.2 C114.2 C116.1 SV29.4 U29.2 U29.3 U29.4 U29.5 U29.6 U29.22 U29.23
GND29: C117.2 C118.2 C120.1 SV30.4 U30.2 U30.3 U30.4 U30.5 U30.6 U30.22 U30.23
GND30: C121.2 C122.2 C124.1 SV31.4 U31.2 U31.3 U31.4 U31.5 U31.6 U31.22 U31.23
GND31: C125.2 C126.2 C128.1 SV32.4 U32.2 U32.3 U32.4 U32.5 U32.6 U32.22 U32.23
GND32: C129.2 C130.2 C132.1 SV33.4 U33.2 U33.3 U33.4 U33.5 U33.6 U33.22 U33.23
GND33: C133.2 C134.2 C136.1 SV34.4 U34.2 U34.3 U34.4 U34.5 U34.6 U34.22 U34.23
GND34: C137.2 C138.2 C140.1 SV35.4 U35.2 U35.3 U35.4 U35.5 U35.6 U35.22 U35.23
GND35: C141.2 C142.2 C144.1 SV36.4 U36.2 U36.3 U36.4 U36.5 U36.6 U36.22 U36.23
GND36: C145.2 C146.2 C148.1 SV37.4 U37.2 U37.3 U37.4 U37.5 U37.6 U37.22 U37.23
GND37: C149.2 C150.2 C152.1 SV38.4 U38.2 U38.3 U38.4 U38.5 U38.6 U38.22 U38.23
GND38: C153.2 C154.2 C156.1 SV39.4 U39.2 U39.3 U39.4 U39.5 U39.6 U39.22 U39.23
GND39: C157.2 C158.2 C160.1 SV40.4 U40.2 U40.3 U40.4 U40.5 U40.6 U40.22 U40.23
GND40: C161.2 C162.2 C164.1 SV41.4 U41.2 U41.3 U41.4 U41.5 U41.6 U41.22 U41.23
GND41: C165.2 C166.2 C168.1 SV42.4 U42.2 U42.3 U42.4 U42.5 U42.6 U42.22 U42.23
GND42: C169.2 C170.2 C172.1 SV43.4 U43.2 U43.3 U43.4 U43.5 U43.6 U43.22 U43.23
GND43: C173.2 C174.2 C176.1 SV44.4 U44.2 U44.3 U44.4 U44.5 U44.6 U44.22 U44.23
GND44: C177.2 C178.2 C180.1 SV45.4 U45.2 U45.3 U45.4 U45.5 U45.6 U45.22 U45.23
GND45: C181.2 C182.2 C184.1 SV46.4 U46.2 U46.3 U46.4 U46.5 U46.6 U46.22 U46.23
GND46: C185.2 C186.2 C188.1 SV47.4 U47.2 U47.3 U47.4 U47.5 U47.6 U47.22 U47.23
GND47: C189.2 C190.2 C192.1 SV48.4 U48.2 U48.3 U48.4 U48.5 U48.6 U48.22 U48.23
GND48: C193.2 C194.2 C196.1 SV49.4 U49.2 U49.3 U49.4 U49.5 U49.6 U49.22 U49.23
GND49: C197.2 C198.2 C200.1 SV50.4 U50.2 U50.3 U50.4 U50.5 U50.6 U50.22 U50.23
GND50: C201.2 C202.2 C204.1 SV51.4 U51.2 U51.3 U51.4 U51.5 U51.6 U51.22 U51.23
GND51: C205.2 C206.2 C208.1 SV52.4 U52.2 U52.3 U52.4 U52.5 U52.6 U52.22 U52.23
GND52: C209.2 C210.2 C212.1 SV53.4 U53.2 U53.3 U53.4 U53.5 U53.6 U53.22 U53.23
GND53: C213.2 C214.2 C216.1 SV54.4 U54.2 U54.3 U54.4 U54.5 U54.6 U54.22 U54.23
GND54: C217.2 C218.2 C220.1 SV55.4 U55.2 U55.3 U55.4 U55.5 U55.6 U55.22 U55.23
GND55: C221.2 C222.2 C224.1 SV56.4 U56.2 U56.3 U56.4 U56.5 U56.6 U56.22 U56.23
GND56: C225.2 C226.2 C228.1 SV57.4 U57.2 U57.3 U57.4 U57.5 U57.6 U57.22 U57.23
GND57: C229.2 C230.2 C232.1 SV58.4 U58.2 U58.3 U58.4 U58.5 U58.6 U58.22 U58.23
GND58: C233.2 C234.2 C236.1 SV59.4 U59.2 U59.3 U59.4 U59.5 U59.6 U59.22 U59.23
GND59: C237.2 C238.2 C240.1 SV60.4 U60.2 U60.3 U60.4 U60.5 U60.6 U60.22 U60.23
GND60: C241.2 C242.2 C244.1 SV61.4 U61.2 U61.3 U61.4 U61.5 U61.6 U61.22 U61.23
GND61: C245.2 C246.2 C248.1 SV62.4 U62.2 U62.3 U62.4 U62.5 U62.6 U62.22 U62.23
GND62: C249.2 C250.2 C252.1 SV63.4 U63.2 U63.3 U63.4 U63.5 U63.6 U63.22 U63.23
GND63: C253.2 C254.2 C256.1 SV64.4 U64.2 U64.3 U64.4 U64.5 U64.6 U64.22 U64.23
N$1: C8.2 U2.7
N$2: C7.2 U2.8
N$3: C7.1 U2.9
N$4: R3.1 U2.19
N$5: R4.1 U2.20
N$6: C12.2 U3.7
N$7: C11.2 U3.8
N$8: C11.1 U3.9
N$9: R5.1 U3.19
N$10: R6.1 U3.20
N$11: C16.2 U4.7
N$12: C15.2 U4.8
N$13: C15.1 U4.9
N$14: R7.1 U4.19
N$15: R8.1 U4.20
N$16: C20.2 U5.7
N$17: C19.2 U5.8
N$18: C19.1 U5.9
N$19: R9.1 U5.19
N$20: C2.2 U1.7
N$21: C1.2 U1.8
N$22: C1.1 U1.9
N$23: R1.1 U1.19
N$24: R2.1 U1.20
N$25: R10.1 U5.20
N$26: C24.2 U6.7
N$27: C23.2 U6.8
N$28: C23.1 U6.9
N$29: R11.1 U6.19
N$30: R12.1 U6.20
N$31: C28.2 U7.7
N$32: C27.2 U7.8
N$33: C27.1 U7.9
N$34: R13.1 U7.19
N$35: R14.1 U7.20
N$36: C32.2 U8.7
N$37: C31.2 U8.8
N$38: C31.1 U8.9
N$39: R15.1 U8.19
N$40: R16.1 U8.20
N$41: C36.2 U9.7
N$42: C35.2 U9.8
N$43: C35.1 U9.9
N$44: R17.1 U9.19
N$45: R18.1 U9.20
N$46: C40.2 U10.7
N$47: C39.2 U10.8
N$48: C39.1 U10.9
N$49: R19.1 U10.19
N$50: R20.1 U10.20
N$51: C44.2 U11.7
N$52: C43.2 U11.8
N$53: C43.1 U11.9
N$54: R21.1 U11.19
N$55: R22.1 U11.20
N$56: C48.2 U12.7
N$57: C47.2 U12.8
N$58: C47.1 U12.9
N$59: R23.1 U12.19
N$60: R24.1 U12.20
N$61: C52.2 U13.7
N$62: C51.2 U13.8
N$63: C51.1 U13.9
N$64: R25.1 U13.19
N$65: R26.1 U13.20
N$66: C56.2 U14.7
N$67: C55.2 U14.8
N$68: C55.1 U14.9
N$69: R27.1 U14.19
N$70: R28.1 U14.20
N$71: C60.2 U15.7
N$72: C59.2 U15.8
N$73: C59.1 U15.9
N$74: R29.1 U15.19
N$75: R30.1 U15.20
N$76: C64.2 U16.7
N$77: C63.2 U16.8
N$78: C63.1 U16.9
N$79: R31.1 U16.19
N$80: R32.1 U16.20
N$81: C68.2 U17.7
N$82: C67.2 U17.8
N$83: C67.1 U17.9
N$84: R33.1 U17.19
N$85: R34.1 U17.20
N$86: C72.2 U18.7
N$87: C71.2 U18.8
N$88: C71.1 U18.9
N$89: R35.1 U18.19
N$90: R36.1 U18.20
N$91: C76.2 U19.7
N$92: C75.2 U19.8
N$93: C75.1 U19.9
N$94: R37.1 U19.19
N$95: R38.1 U19.20
N$96: C80.2 U20.7
N$97: C79.2 U20.8
N$98: C79.1 U20.9
N$99: R39.1 U20.19
N$100: R40.1 U20.20
N$101: C84.2 U21.7
N$102: C83.2 U21.8
N$103: C83.1 U21.9
N$104: R41.1 U21.19
N$105: R42.1 U21.20
N$106: C88.2 U22.7
N$107: C87.2 U22.8
N$108: C87.1 U22.9
N$109: R43.1 U22.19
N$110: R44.1 U22.20
N$111: C92.2 U23.7
N$112: C91.2 U23.8
N$113: C91.1 U23.9
N$114: R45.1 U23.19
N$115: R46.1 U23.20
N$116: C96.2 U24.7
N$117: C95.2 U24.8
N$118: C95.1 U24.9
N$119: R47.1 U24.19
N$120: R48.1 U24.20
N$121: C100.2 U25.7
N$122: C99.2 U25.8
N$123: C99.1 U25.9
N$124: R49.1 U25.19
N$125: R50.1 U25.20
N$126: C104.2 U26.7
N$127: C103.2 U26.8
N$128: C103.1 U26.9
N$129: R51.1 U26.19
N$130: R52.1 U26.20
N$131: C108.2 U27.7
N$132: C107.2 U27.8
N$133: C107.1 U27.9
N$134: R53.1 U27.19
N$135: R54.1 U27.20
N$136: C112.2 U28.7
N$137: C111.2 U28.8
N$138: C111.1 U28.9
N$139: R55.1 U28.19
N$140: R56.1 U28.20
N$141: C116.2 U29.7
N$142: C115.2 U29.8
N$143: C115.1 U29.9
N$144: R57.1 U29.19
N$145: R58.1 U29.20
N$146: C120.2 U30.7
N$147: C119.2 U30.8
N$148: C119.1 U30.9
N$149: R59.1 U30.19
N$150: R60.1 U30.20
N$151: C124.2 U31.7
N$152: C123.2 U31.8
N$153: C123.1 U31.9
N$154: R61.1 U31.19
N$155: R62.1 U31.20
N$156: C128.2 U32.7
N$157: C127.2 U32.8
N$158: C127.1 U32.9
N$159: R63.1 U32.19
N$160: R64.1 U32.20
N$161: C132.2 U33.7
N$162: C131.2 U33.8
N$163: C131.1 U33.9
N$164: R65.1 U33.19
N$165: R66.1 U33.20
N$166: C136.2 U34.7
N$167: C135.2 U34.8
N$168: C135.1 U34.9
N$169: R67.1 U34.19
N$170: R68.1 U34.20
N$171: C140.2 U35.7
N$172: C139.2 U35.8
N$173: C139.1 U35.9
N$174: R69.1 U35.19
N$175: R70.1 U35.20
N$176: C144.2 U36.7
N$177: C143.2 U36.8
N$178: C143.1 U36.9
N$179: R71.1 U36.19
N$180: R72.1 U36.20
N$181: C148.2 U37.7
N$182: C147.2 U37.8
N$183: C147.1 U37.9
N$184: R73.1 U37.19
N$185: R74.1 U37.20
N$186: C152.2 U38.7
N$187: C151.2 U38.8
N$188: C151.1 U38.9
N$189: R75.1 U38.19
N$190: R76.1 U38.20
N$191: C156.2 U39.7
N$192: C155.2 U39.8
N$193: C155.1 U39.9
N$194: R77.1 U39.19
N$195: R78.1 U39.20
N$196: C160.2 U40.7
N$197: C159.2 U40.8
N$198: C159.1 U40.9
N$199: R79.1 U40.19
N$200: R80.1 U40.20
N$201: C164.2 U41.7
N$202: C163.2 U41.8
N$203: C163.1 U41.9
N$204: R81.1 U41.19
N$205: R82.1 U41.20
N$206: C168.2 U42.7
N$207: C167.2 U42.8
N$208: C167.1 U42.9
N$209: R83.1 U42.19
N$210: R84.1 U42.20
N$211: C172.2 U43.7
N$212: C171.2 U43.8
N$213: C171.1 U43.9
N$214: R85.1 U43.19
N$215: R86.1 U43.20
N$216: C176.2 U44.7
N$217: C175.2 U44.8
N$218: C175.1 U44.9
N$219: R87.1 U44.19
N$220: R88.1 U44.20
N$221: C180.2 U45.7
N$222: C179.2 U45.8
N$223: C179.1 U45.9
N$224: R89.1 U45.19
N$225: R90.1 U45.20
N$226: C184.2 U46.7
N$227: C183.2 U46.8
N$228: C183.1 U46.9
N$229: R91.1 U46.19
N$230: R92.1 U46.20
N$231: C188.2 U47.7
N$232: C187.2 U47.8
N$233: C187.1 U47.9
N$234: R93.1 U47.19
N$235: R94.1 U47.20
N$236: C192.2 U48.7
N$237: C191.2 U48.8
N$238: C191.1 U48.9
N$239: R95.1 U48.19
N$240: R96.1 U48.20
N$241: C196.2 U49.7
N$242: C195.2 U49.8
N$243: C195.1 U49.9
N$244: R97.1 U49.19
N$245: R98.1 U49.20
N$246: C200.2 U50.7
N$247: C199.2 U50.8
N$248: C199.1 U50.9
N$249: R99.1 U50.19
N$250: R100.1 U50.20
N$251: C204.2 U51.7
N$252: C203.2 U51.8
N$253: C203.1 U51.9
N$254: R101.1 U51.19
N$255: R102.1 U51.20
N$256: C208.2 U52.7
N$257: C207.2 U52.8
N$258: C207.1 U52.9
N$259: R103.1 U52.19
N$260: R104.1 U52.20
N$261: C212.2 U53.7
N$262: C211.2 U53.8
N$263: C211.1 U53.9
N$264: R105.1 U53.19
N$265: R106.1 U53.20
N$266: C216.2 U54.7
N$267: C215.2 U54.8
N$268: C215.1 U54.9
N$269: R107.1 U54.19
N$270: R108.1 U54.20
N$271: C220.2 U55.7
N$272: C219.2 U55.8
N$273: C219.1 U55.9
N$274: R109.1 U55.19
N$275: R110.1 U55.20
N$276: C224.2 U56.7
N$277: C223.2 U56.8
N$278: C223.1 U56.9
N$279: R111.1 U56.19
N$280: R112.1 U56.20
N$281: C228.2 U57.7
N$282: C227.2 U57.8
N$283: C227.1 U57.9
N$284: R113.1 U57.19
N$285: R114.1 U57.20
N$286: C232.2 U58.7
N$287: C231.2 U58.8
N$288: C231.1 U58.9
N$289: R115.1 U58.19
N$290: R116.1 U58.20
N$291: C236.2 U59.7
N$292: C235.2 U59.8
N$293: C235.1 U59.9
N$294: R117.1 U59.19
N$295: R118.1 U59.20
N$296: C240.2 U60.7
N$297: C239.2 U60.8
N$298: C239.1 U60.9
N$299: R119.1 U60.19
N$300: R120.1 U60.20
N$301: C244.2 U61.7
N$302: C243.2 U61.8
N$303: C243.1 U61.9
N$304: R121.1 U61.19
N$305: R122.1 U61.20
N$306: C248.2 U62.7
N$307: C247.2 U62.8
N$308: C247.1 U62.9
N$309: R123.1 U62.19
N$310: R124.1 U62.20
N$311: C252.2 U63.7
N$312: C251.2 U63.8
N$313: C251.1 U63.9
N$314: R125.1 U63.19
N$315: R126.1 U63.20
N$316: C256.2 U64.7
N$317: C255.2 U64.8
N$318: C255.1 U64.9
N$319: R127.1 U64.19
N$320: R128.1 U64.20
SCL: SV1.2 U1.21
SCL1: SV2.2 U2.21
SCL2: SV3.2 U3.21
SCL3: SV4.2 U4.21
SCL4: SV5.2 U5.21
SCL5: SV6.2 U6.21
SCL6: SV7.2 U7.21
SCL7: SV8.2 U8.21
SCL8: SV9.2 U9.21
SCL9: SV10.2 U10.21
SCL10: SV11.2 U11.21
SCL11: SV12.2 U12.21
SCL12: SV13.2 U13.21
SCL13: SV14.2 U14.21
SCL14: SV15.2 U15.21
SCL15: SV16.2 U16.21
SCL16: SV17.2 U17.21
SCL17: SV18.2 U18.21
SCL18: SV19.2 U19.21
SCL19: SV20.2 U20.21
SCL20: SV21.2 U21.21
SCL21: SV22.2 U22.21
SCL22: SV23.2 U23.21
SCL23: SV24.2 U24.21
SCL24: SV25.2 U25.21
SCL25: SV26.2 U26.21
SCL26: SV27.2 U27.21
SCL27: SV28.2 U28.21
SCL28: SV29.2 U29.21
SCL29: SV30.2 U30.21
SCL30: SV31.2 U31.21
SCL31: SV32.2 U32.21
SCL32: SV33.2 U33.21
SCL33: SV34.2 U34.21
SCL34: SV35.2 U35.21
SCL35: SV36.2 U36.21
SCL36: SV37.2 U37.21
SCL37: SV38.2 U38.21
SCL38: SV39.2 U39.21
SCL39: SV40.2 U40.21
SCL40: SV41.2 U41.21
SCL41: SV42.2 U42.21
SCL42: SV43.2 U43.21
SCL43: SV44.2 U44.21
SCL44: SV45.2 U45.21
SCL45: SV46.2 U46.21
SCL46: SV47.2 U47.21
SCL47: SV48.2 U48.21
SCL48: SV49.2 U49.21
SCL49: SV50.2 U50.21
SCL50: SV51.2 U51.21
SCL51: SV52.2 U52.21
SCL52: SV53.2 U53.21
SCL53: SV54.2 U54.21
SCL54: SV55.2 U55.21
SCL55: SV56.2 U56.21
SCL56: SV57.2 U57.21
SCL57: SV58.2 U58.21
SCL58: SV59.2 U59.21
SCL59: SV60.2 U60.21
SCL60: SV61.2 U61.21
SCL61: SV62.2 U62.21
SCL62: SV63.2 U63.21
SCL63: SV64.2 U64.21
SDA: SV1.3 U1.24
SDA1: SV2.3 U2.24
SDA2: SV3.3 U3.24
SDA3: SV4.3 U4.24
SDA4: SV5.3 U5.24
SDA5: SV6.3 U6.24
SDA6: SV7.3 U7.24
SDA7: SV8.3 U8.24
SDA8: SV9.3 U9.24
SDA9: SV10.3 U10.24
SDA10: SV11.3 U11.24
SDA11: SV12.3 U12.24
SDA12: SV13.3 U13.24
SDA13: SV14.3 U14.24
SDA14: SV15.3 U15.24
SDA15: SV16.3 U16.24
SDA16: SV17.3 U17.24
SDA17: SV18.3 U18.24
SDA18: SV19.3 U19.24
SDA19: SV20.3 U20.24
SDA20: SV21.3 U21.24
SDA21: SV22.3 U22.24
SDA22: SV23.3 U23.24
SDA23: SV24.3 U24.24
SDA24: SV25.3 U25.24
SDA25: SV26.3 U26.24
SDA26: SV27.3 U27.24
SDA27: SV28.3 U28.24
SDA28: SV29.3 U29.24
SDA29: SV30.3 U30.24
SDA30: SV31.3 U31.24
SDA31: SV32.3 U32.24
SDA32: SV33.3 U33.24
SDA33: SV34.3 U34.24
SDA34: SV35.3 U35.24
SDA35: SV36.3 U36.24
SDA36: SV37.3 U37.24
SDA37: SV38.3 U38.24
SDA38: SV39.3 U39.24
SDA39: SV40.3 U40.24
SDA40: SV41.3 U41.24
SDA41: SV42.3 U42.24
SDA42: SV43.3 U43.24
SDA43: SV44.3 U44.24
SDA44: SV45.3 U45.24
SDA45: SV46.3 U46.24
SDA46: SV47.3 U47.24
SDA47: SV48.3 U48.24
SDA48: SV49.3 U49.24
SDA49: SV50.3 U50.24
SDA50: SV51.3 U51.24
SDA51: SV52.3 U52.24
SDA52: SV53.3 U53.24
SDA53: SV54.3 U54.24
SDA54: SV55.3 U55.24
SDA55: SV56.3 U56.24
SDA56: SV57.3 U57.24
SDA57: SV58.3 U58.24
SDA58: SV59.3 U59.24
SDA59: SV60.3 U60.24
SDA60: SV61.3 U61.24
SDA61: SV62.3 U62.24
SDA62: SV63.3 U63.24
SDA63: SV64.3 U64.24
VDD: C3.1 C4.1 R1.2 R2.2 SV1.1 U1.15 U1.16 U1.17 U1.18
VDD1: C5.1 C6.1 R3.2 R4.2 SV2.1 U2.15 U2.16 U2.17 U2.18
VDD2: C9.1 C10.1 R5.2 R6.2 SV3.1 U3.15 U3.16 U3.17 U3.18
VDD3: C13.1 C14.1 R7.2 R8.2 SV4.1 U4.15 U4.16 U4.17 U4.18
VDD4: C17.1 C18.1 R9.2 R10.2 SV5.1 U5.15 U5.16 U5.17 U5.18
VDD5: C21.1 C22.1 R11.2 R12.2 SV6.1 U6.15 U6.16 U6.17 U6.18
VDD6: C25.1 C26.1 R13.2 R14.2 SV7.1 U7.15 U7.16 U7.17 U7.18
VDD7: C29.1 C30.1 R15.2 R16.2 SV8.1 U8.15 U8.16 U8.17 U8.18
VDD8: C33.1 C34.1 R17.2 R18.2 SV9.1 U9.15 U9.16 U9.17 U9.18
VDD9: C37.1 C38.1 R19.2 R20.2 SV10.1 U10.15 U10.16 U10.17 U10.18
VDD10: C41.1 C42.1 R21.2 R22.2 SV11.1 U11.15 U11.16 U11.17 U11.18
VDD11: C45.1 C46.1 R23.2 R24.2 SV12.1 U12.15 U12.16 U12.17 U12.18
VDD12: C49.1 C50.1 R25.2 R26.2 SV13.1 U13.15 U13.16 U13.17 U13.18
VDD13: C53.1 C54.1 R27.2 R28.2 SV14.1 U14.15 U14.16 U14.17 U14.18
VDD14: C57.1 C58.1 R29.2 R30.2 SV15.1 U15.15 U15.16 U15.17 U15.18
VDD15: C61.1 C62.1 R31.2 R32.2 SV16.1 U16.15 U16.16 U16.17 U16.18
VDD16: C65.1 C66.1 R33.2 R34.2 SV17.1 U17.15 U17.16 U17.17 U17.18
VDD17: C69.1 C70.1 R35.2 R36.2 SV18.1 U18.15 U18.16 U18.17 U18.18
VDD18: C73.1 C74.1 R37.2 R38.2 SV19.1 U19.15 U19.16 U19.17 U19.18
VDD19: C77.1 C78.1 R39.2 R40.2 SV20.1 U20.15 U20.16 U20.17 U20.18
VDD20: C81.1 C82.1 R41.2 R42.2 SV21.1 U21.15 U21.16 U21.17 U21.18
VDD21: C85.1 C86.1 R43.2 R44.2 SV22.1 U22.15 U22.16 U22.17 U22.18
VDD22: C89.1 C90.1 R45.2 R46.2 SV23.1 U23.15 U23.16 U23.17 U23.18
VDD23: C93.1 C94.1 R47.2 R48.2 SV24.1 U24.15 U24.16 U24.17 U24.18
VDD24: C97.1 C98.1 R49.2 R50.2 SV25.1 U25.15 U25.16 U25.17 U25.18
VDD25: C101.1 C102.1 R51.2 R52.2 SV26.1 U26.15 U26.16 U26.17 U26.18
VDD26: C105.1 C106.1 R53.2 R54.2 SV27.1 U27.15 U27.16 U27.17 U27.18
VDD27: C109.1 C110.1 R55.2 R56.2 SV28.1 U28.15 U28.16 U28.17 U28.18
VDD28: C113.1 C114.1 R57.2 R58.2 SV29.1 U29.15 U29.16 U29.17 U29.18
VDD29: C117.1 C118.1 R59.2 R60.2 SV30.1 U30.15 U30.16 U30.17 U30.18
VDD30: C121.1 C122.1 R61.2 R62.2 SV31.1 U31.15 U31.16 U31.17 U31.18
VDD31: C125.1 C126.1 R63.2 R64.2 SV32.1 U32.15 U32.16 U32.17 U32.18
VDD32: C129.1 C130.1 R65.2 R66.2 SV33.1 U33.15 U33.16 U33.17 U33.18
VDD33: C133.1 C134.1 R67.2 R68.2 SV34.1 U34.15 U34.16 U34.17 U34.18
VDD34: C137.1 C138.1 R69.2 R70.2 SV35.1 U35.15 U35.16 U35.17 U35.18
VDD35: C141.1 C142.1 R71.2 R72.2 SV36.1 U36.15 U36.16 U36.17 U36.18
VDD36: C145.1 C146.1 R73.2 R74.2 SV37.1 U37.15 U37.16 U37.17 U37.18
VDD37: C149.1 C150.1 R75.2 R76.2 SV38.1 U38.15 U38.16 U38.17 U38.18
VDD38: C153.1 C154.1 R77.2 R78.2 SV39.1 U39.15 U39.16 U39.17 U39.18
VDD39: C157.1 C158.1 R79.2 R80.2 SV40.1 U40.15 U40.16 U40.17 U40.18
VDD40: C161.1 C162.1 R81.2 R82.2 SV41.1 U41.15 U41.16 U41.17 U41.18
VDD41: C165.1 C166.1 R83.2 R84.2 SV42.1 U42.15 U42.16 U42.17 U42.18
VDD42: C169.1 C170.1 R85.2 R86.2 SV43.1 U43.15 U43.16 U43.17 U43.18
VDD43: C173.1 C174.1 R87.2 R88.2 SV44.1 U44.15 U44.16 U44.17 U44.18
VDD44: C177.1 C178.1 R89.2 R90.2 SV45.1 U45.15 U45.16 U45.17 U45.18
VDD45: C181.1 C182.1 R91.2 R92.2 SV46.1 U46.15 U46.16 U46.17 U46.18
VDD46: C185.1 C186.1 R93.2 R94.2 SV47.1 U47.15 U47.16 U47.17 U47.18
VDD47: C189.1 C190.1 R95.2 R96.2 SV48.1 U48.15 U48.16 U48.17 U48.18
VDD48: C193.1 C194.1 R97.2 R98.2 SV49.1 U49.15 U49.16 U49.17 U49.18
VDD49: C197.1 C198.1 R99.2 R100.2 SV50.1 U50.15 U50.16 U50.17 U50.18
VDD50: C201.1 C202.1 R101.2 R102.2 SV51.1 U51.15 U51.16 U51.17 U51.18
VDD51: C205.1 C206.1 R103.2 R104.2 SV52.1 U52.15 U52.16 U52.17 U52.18
VDD52: C209.1 C210.1 R105.2 R106.2 SV53.1 U53.15 U53.16 U53.17 U53.18
VDD53: C213.1 C214.1 R107.2 R108.2 SV54.1 U54.15 U54.16 U54.17 U54.18
VDD54: C217.1 C218.1 R109.2 R110.2 SV55.1 U55.15 U55.16 U55.17 U55.18
VDD55: C221.1 C222.1 R111.2 R112.2 SV56.1 U56.15 U56.16 U56.17 U56.18
VDD56: C225.1 C226.1 R113.2 R114.2 SV57.1 U57.15 U57.16 U57.17 U57.18
VDD57: C229.1 C230.1 R115.2 R116.2 SV58.1 U58.15 U58.16 U58.17 U58.18
VDD58: C233.1 C234.1 R117.2 R118.2 SV59.1 U59.15 U59.16 U59.17 U59.18
VDD59: C237.1 C238.1 R119.2 R120.2 SV60.1 U60.15 U60.16 U60.17 U60.18
VDD60: C241.1 C242.1 R121.2 R122.2 SV61.1 U61.15 U61.16 U61.17 U61.18
VDD61: C245.1 C246.1 R123.2 R124.2 SV62.1 U62.15 U62.16 U62.17 U62.18
VDD62: C249.1 C250.1 R125.2 R126.2 SV63.1 U63.15 U63.16 U63.17 U63.18
VDD63: C253.1 C254.1 R127.2 R128.2 SV64.1 U64.15 U64.16 U64.17 U64.18

## Tracks (layer width: path | path; a pad name or v marks a point on that pad's centre or on a via)
GND
  Top 0.305: U1.6 10.43,16.09 C2.1 10.93,16.15 | 10.93,16.15 11.43,16.15 | 11.43,16.15 11.93,16.15 | 11.93,16.15 12.43,16.15 | 12.43,16.15 13.61,16.15 14.78,14.99 16.22,14.99 C4.2 C3.2 19.86,15.04 20.57,15.75 SV1.4 23.75,15.75 24.69,14.81 24.69,12.5 24.13,11.94 21.11,11.94 20.66,12.38 15.77,12.38 | U1.4 11.43,16.15 | U1.3 11.93,16.15 | U1.5 10.93,16.15 | U1.2 12.43,16.15 | U1.23 15.77,12.38 | U1.22 13.97,11.89 15.77,11.89 15.77,12.38
  pour Top: 5.74,6.2 24.77,6.2 24.77,18.36 5.84,18.36 5.84,14.38 14.4,14.38 14.4,8.74 5.74,8.74
GND1
  Top 0.305: U2.6 10.41,35.65 C8.1 10.91,35.71 | 10.91,35.71 11.41,35.71 | 11.41,35.71 11.91,35.71 | 11.91,35.71 12.41,35.71 | 12.41,35.71 13.59,35.71 14.76,34.54 16.19,34.54 C5.2 C6.2 18.48,34.59 19.84,34.59 20.55,35.31 SV2.4 23.72,35.31 24.66,34.37 24.66,32.05 24.1,31.5 21.08,31.5 20.64,31.94 15.75,31.94 | U2.4 11.41,35.71 | U2.3 11.91,35.71 | U2.5 10.91,35.71 | U2.2 12.41,35.71 | U2.23 15.75,31.94 | U2.22 13.94,31.45 15.75,31.45 15.75,31.94
  pour Top: 5.71,25.76 24.74,25.76 24.74,37.92 5.82,37.92 5.82,33.93 14.38,33.93 14.38,28.3 5.71,28.3
GND2
  Top 0.305: U3.6 10.43,55.26 C12.1 10.93,55.32 | 10.93,55.32 11.43,55.32 | 11.43,55.32 11.93,55.32 | 11.93,55.32 12.43,55.32 | 12.43,55.32 13.61,55.32 14.78,54.15 16.22,54.15 C9.2 C10.2 18.5,54.2 19.86,54.2 20.57,54.91 SV3.4 23.75,54.91 24.69,53.98 24.69,51.66 24.13,51.1 21.11,51.1 20.66,51.55 15.77,51.55 | U3.4 11.43,55.32 | U3.3 11.93,55.32 | U3.5 10.93,55.32 | U3.2 12.43,55.32 | U3.23 15.77,51.55 | U3.22 13.97,51.05 15.77,51.05 15.77,51.55
  pour Top: 5.74,45.36 24.77,45.36 24.77,57.53 5.84,57.53 5.84,53.54 14.4,53.54 14.4,47.9 5.74,47.9
GND3
  Top 0.305: U4.6 10.41,74.82 C16.1 10.91,74.88 | 10.91,74.88 11.41,74.88 | 11.41,74.88 11.91,74.88 | 11.91,74.88 12.41,74.88 | 12.41,74.88 13.59,74.88 14.76,73.71 16.19,73.71 C13.2 C14.2 19.84,73.76 20.55,74.47 SV4.4 23.72,74.47 24.66,73.53 24.66,71.22 24.1,70.66 21.08,70.66 20.64,71.11 15.75,71.11 | U4.4 11.41,74.88 | U4.3 11.91,74.88 | U4.5 10.91,74.88 | U4.2 12.41,74.88 | U4.23 15.75,71.11 | U4.22 13.94,70.61 15.75,70.61 15.75,71.11
  pour Top: 5.71,64.92 24.74,64.92 24.74,77.09 5.82,77.09 5.82,73.1 14.38,73.1 14.38,67.46 5.71,67.46
GND4
  Top 0.305: U5.6 10.43,94.38 C20.1 10.93,94.44 | 10.93,94.44 11.43,94.44 | 11.43,94.44 11.93,94.44 | 11.93,94.44 12.43,94.44 | 12.43,94.44 13.61,94.44 14.78,93.27 16.22,93.27 C17.2 C18.2 19.86,93.32 20.57,94.03 SV5.4 23.75,94.03 24.69,93.09 24.69,90.78 24.13,90.22 21.11,90.22 20.66,90.67 15.77,90.67 | U5.4 11.43,94.44 | U5.3 11.93,94.44 | U5.5 10.93,94.44 | U5.2 12.43,94.44 | U5.23 15.77,90.67 | U5.22 13.97,90.17 15.77,90.17 15.77,90.67
  pour Top: 5.74,84.48 24.77,84.48 24.77,96.65 5.84,96.65 5.84,92.66 14.4,92.66 14.4,87.02 5.74,87.02
GND5
  Top 0.305: U6.6 10.41,113.93 C24.1 10.91,114 | 10.91,114 11.41,114 | 11.41,114 11.91,114 | 11.91,114 12.41,114 | 12.41,114 13.59,114 14.76,112.83 16.19,112.83 C21.2 C22.2 19.84,112.88 20.55,113.59 SV6.4 23.72,113.59 24.66,112.65 24.66,110.34 24.1,109.78 21.08,109.78 20.64,110.22 15.75,110.22 | U6.4 11.41,114 | U6.3 11.91,114 | U6.5 10.91,114 | U6.2 12.41,114 | U6.23 15.75,110.22 | U6.22 13.94,109.73 15.75,109.73 15.75,110.22
  pour Top: 5.71,104.04 24.74,104.04 24.74,116.2 5.82,116.2 5.82,112.22 14.38,112.22 14.38,106.58 5.71,106.58
GND6
  Top 0.305: U7.6 10.43,133.54 C28.1 10.93,133.6 | 10.93,133.6 11.43,133.6 | 11.43,133.6 11.93,133.6 | 11.93,133.6 12.43,133.6 | 12.43,133.6 13.61,133.6 14.78,132.44 16.22,132.44 C25.2 C26.2 18.5,132.49 19.86,132.49 20.57,133.2 SV7.4 23.75,133.2 24.69,132.26 24.69,129.95 24.13,129.39 21.11,129.39 20.66,129.83 15.77,129.83 | U7.4 11.43,133.6 | U7.3 11.93,133.6 | U7.5 10.93,133.6 | U7.2 12.43,133.6 | U7.23 15.77,129.83 | U7.22 13.97,129.34 15.77,129.34 15.77,129.83
  pour Top: 5.74,123.65 24.77,123.65 24.77,135.81 5.84,135.81 5.84,131.83 14.4,131.83 14.4,126.19 5.74,126.19
GND7
  Top 0.305: U8.6 10.41,153.1 C32.1 10.91,153.16 | 10.91,153.16 11.41,153.16 | 11.41,153.16 11.91,153.16 | 11.91,153.16 12.41,153.16 | 12.41,153.16 13.59,153.16 14.76,151.99 16.19,151.99 C29.2 C30.2 18.48,152.04 19.84,152.04 20.55,152.76 SV8.4 23.72,152.76 24.66,151.82 24.66,149.5 24.1,148.95 21.08,148.95 20.64,149.39 15.75,149.39 | U8.4 11.41,153.16 | U8.3 11.91,153.16 | U8.5 10.91,153.16 | U8.2 12.41,153.16 | U8.23 15.75,149.39 | U8.22 13.94,148.89 15.75,148.89 15.75,149.39
  pour Top: 5.71,143.21 24.74,143.21 24.74,155.37 5.82,155.37 5.82,151.38 14.38,151.38 14.38,145.75 5.71,145.75
GND8
  Top 0.305: U9.6 35.94,16.09 C36.1 36.44,16.15 | 36.44,16.15 36.94,16.15 | 36.94,16.15 37.44,16.15 | 37.44,16.15 37.94,16.15 | 37.94,16.15 39.12,16.15 40.28,14.99 41.72,14.99 C33.2 C34.2 45.36,15.04 46.08,15.75 SV9.4 49.25,15.75 50.19,14.81 50.19,12.5 49.63,11.94 46.61,11.94 46.16,12.38 41.28,12.38 | U9.4 36.94,16.15 | U9.3 37.44,16.15 | U9.5 36.44,16.15 | U9.2 37.94,16.15 | U9.23 41.28,12.38 | U9.22 39.47,11.89 41.28,11.89 41.28,12.38
  pour Top: 31.24,6.2 50.27,6.2 50.27,18.36 31.34,18.36 31.34,14.38 39.9,14.38 39.9,8.74 31.24,8.74
GND9
  Top 0.305: U10.6 35.91,35.65 C40.1 36.41,35.71 | 36.41,35.71 36.91,35.71 | 36.91,35.71 37.41,35.71 | 37.41,35.71 37.91,35.71 | 37.91,35.71 39.09,35.71 40.26,34.54 41.69,34.54 C37.2 C38.2 43.98,34.59 45.34,34.59 46.05,35.31 SV10.4 49.23,35.31 50.17,34.37 50.17,32.05 49.61,31.5 46.58,31.5 46.14,31.94 41.25,31.94 | U10.4 36.91,35.71 | U10.3 37.41,35.71 | U10.5 36.41,35.71 | U10.2 37.91,35.71 | U10.23 41.25,31.94 | U10.22 39.44,31.45 41.25,31.45 41.25,31.94
  pour Top: 31.22,25.76 50.24,25.76 50.24,37.92 31.32,37.92 31.32,33.93 39.88,33.93 39.88,28.3 31.22,28.3
GND10
  Top 0.305: U11.6 35.94,55.26 C44.1 36.44,55.32 | 36.44,55.32 36.94,55.32 | 36.94,55.32 37.44,55.32 | 37.44,55.32 37.94,55.32 | 37.94,55.32 39.12,55.32 40.28,54.15 41.72,54.15 C41.2 C42.2 44,54.2 45.36,54.2 46.08,54.91 SV11.4 49.25,54.91 50.19,53.98 50.19,51.66 49.63,51.1 46.61,51.1 46.16,51.55 41.28,51.55 | U11.4 36.94,55.32 | U11.3 37.44,55.32 | U11.5 36.44,55.32 | U11.2 37.94,55.32 | U11.23 41.28,51.55 | U11.22 39.47,51.05 41.28,51.05 41.28,51.55
  pour Top: 31.24,45.36 50.27,45.36 50.27,57.53 31.34,57.53 31.34,53.54 39.9,53.54 39.9,47.9 31.24,47.9
GND11
  Top 0.305: U12.6 35.91,74.82 C48.1 36.41,74.88 | 36.41,74.88 36.91,74.88 | 36.91,74.88 37.41,74.88 | 37.41,74.88 37.91,74.88 | 37.91,74.88 39.09,74.88 40.26,73.71 41.69,73.71 C45.2 C46.2 43.98,73.76 45.34,73.76 46.05,74.47 SV12.4 49.23,74.47 50.17,73.53 50.17,71.22 49.61,70.66 46.58,70.66 46.14,71.11 41.25,71.11 | U12.4 36.91,74.88 | U12.3 37.41,74.88 | U12.5 36.41,74.88 | U12.2 37.91,74.88 | U12.23 41.25,71.11 | U12.22 39.44,70.61 41.25,70.61 41.25,71.11
  pour Top: 31.22,64.92 50.24,64.92 50.24,77.09 31.32,77.09 31.32,73.1 39.88,73.1 39.88,67.46 31.22,67.46
GND12
  Top 0.305: U13.6 35.94,94.38 C52.1 36.44,94.44 | 36.44,94.44 36.94,94.44 | 36.94,94.44 37.44,94.44 | 37.44,94.44 37.94,94.44 | 37.94,94.44 39.12,94.44 40.28,93.27 41.72,93.27 C49.2 C50.2 45.36,93.32 46.08,94.03 SV13.4 49.25,94.03 50.19,93.09 50.19,90.78 49.63,90.22 46.61,90.22 46.16,90.67 41.28,90.67 | U13.4 36.94,94.44 | U13.3 37.44,94.44 | U13.5 36.44,94.44 | U13.2 37.94,94.44 | U13.23 41.28,90.67 | U13.22 39.47,90.17 41.28,90.17 41.28,90.67
  pour Top: 31.24,84.48 50.27,84.48 50.27,96.65 31.34,96.65 31.34,92.66 39.9,92.66 39.9,87.02 31.24,87.02
GND13
  Top 0.305: U14.6 35.91,113.93 C56.1 36.41,114 | 36.41,114 36.91,114 | 36.91,114 37.41,114 | 37.41,114 37.91,114 | 37.91,114 39.09,114 40.26,112.83 41.69,112.83 C53.2 C54.2 43.98,112.88 45.34,112.88 46.05,113.59 SV14.4 49.23,113.59 50.17,112.65 50.17,110.34 49.61,109.78 46.58,109.78 46.14,110.22 41.25,110.22 | U14.4 36.91,114 | U14.3 37.41,114 | U14.5 36.41,114 | U14.2 37.91,114 | U14.23 41.25,110.22 | U14.22 39.44,109.73 41.25,109.73 41.25,110.22
  pour Top: 31.22,104.04 50.24,104.04 50.24,116.2 31.32,116.2 31.32,112.22 39.88,112.22 39.88,106.58 31.22,106.58
GND14
  Top 0.305: U15.6 35.94,133.54 C60.1 36.44,133.6 | 36.44,133.6 36.94,133.6 | 36.94,133.6 37.44,133.6 | 37.44,133.6 37.94,133.6 | 37.94,133.6 39.12,133.6 40.28,132.44 41.72,132.44 C57.2 C58.2 44,132.49 45.36,132.49 46.08,133.2 SV15.4 49.25,133.2 50.19,132.26 50.19,129.95 49.63,129.39 46.61,129.39 46.16,129.83 41.28,129.83 | U15.4 36.94,133.6 | U15.3 37.44,133.6 | U15.5 36.44,133.6 | U15.2 37.94,133.6 | U15.23 41.28,129.83 | U15.22 39.47,129.34 41.28,129.34 41.28,129.83
  pour Top: 31.24,123.65 50.27,123.65 50.27,135.81 31.34,135.81 31.34,131.83 39.9,131.83 39.9,126.19 31.24,126.19
GND15